# EAGLE board XPL-32 - Copy - Copy (EAGLE 9.6.2)
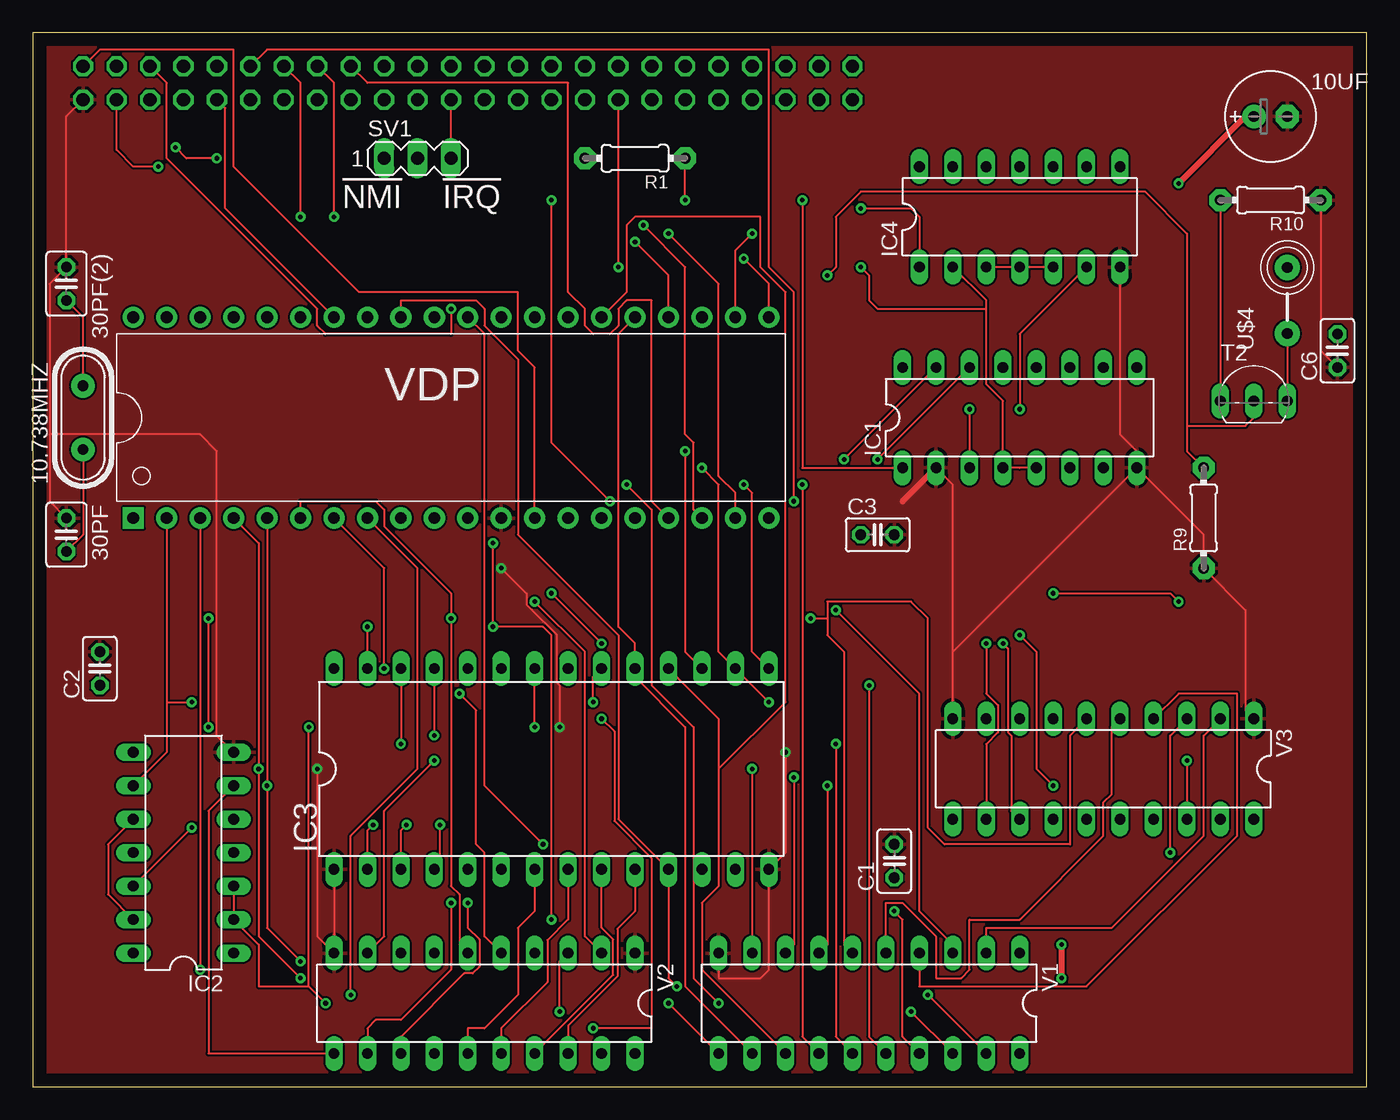
[diagram p0: board, top side]
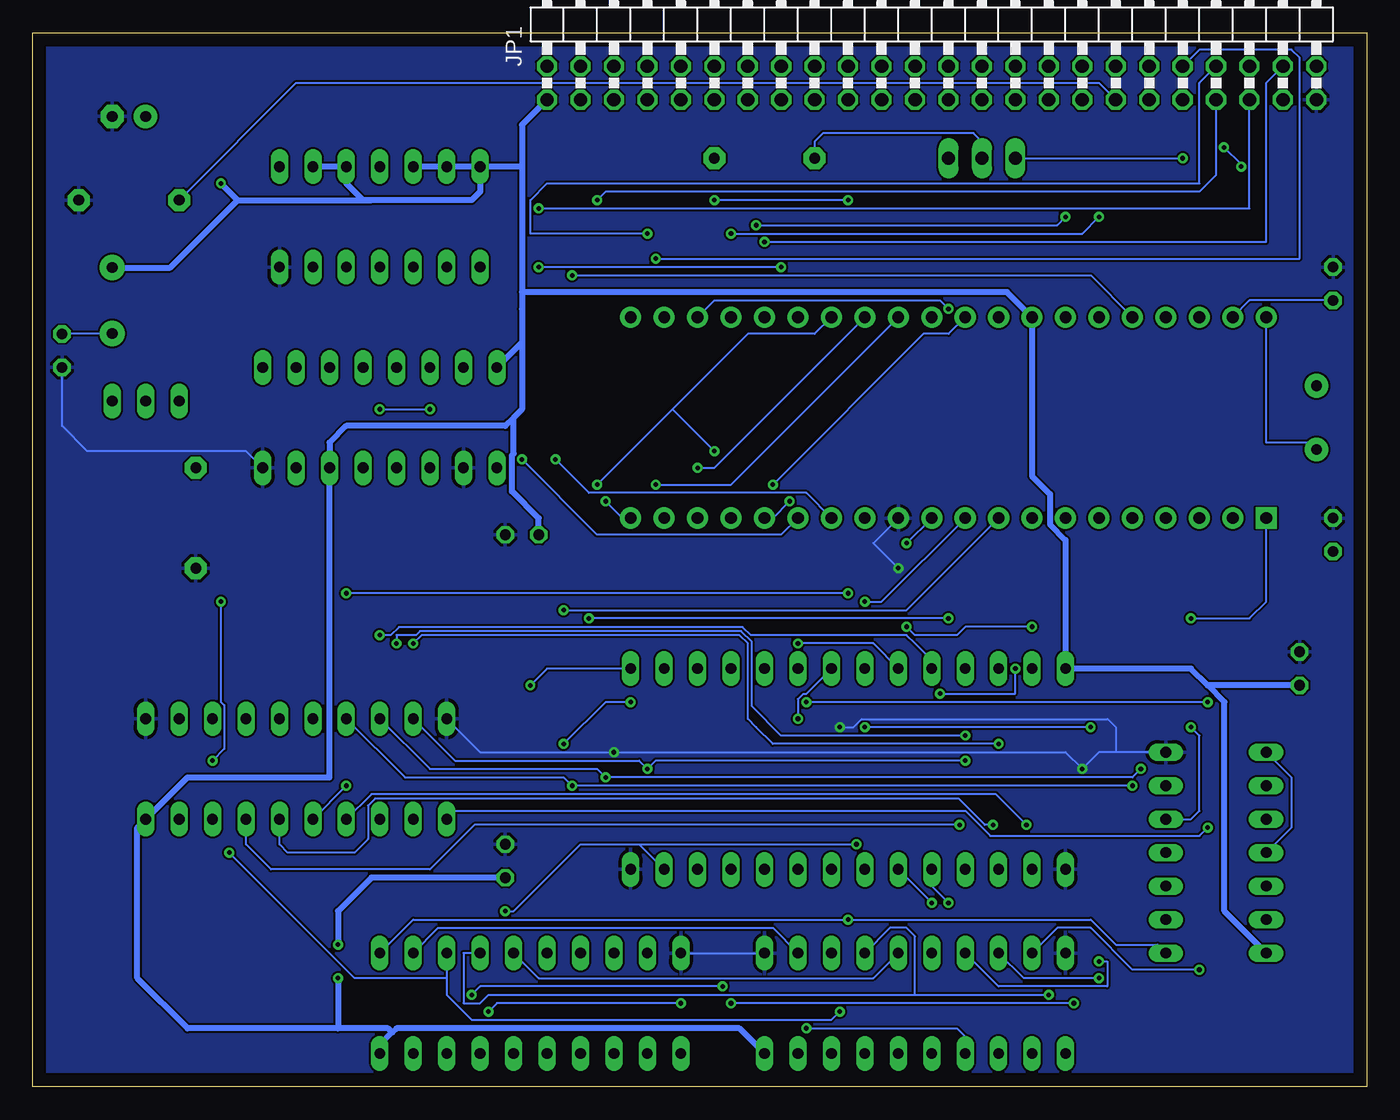
[diagram p1: board, bottom side, seen from below]

Size 101.27 x 80 mm. Coordinates in mm from the lower left corner, seen from the top.
Outline: 0,0 101.27,0 101.27,80 0,80 0,0
Copper layers (1*16): Top 0.035mm / dielectric 1.5mm / Bottom 0.035mm
Design rules "default": minimum track width 6mil, minimum drill 0.35mm, track to track 6mil, track to pad 6mil, pad to pad 6mil, via to via 6mil, smd to smd 6mil, copper to edge 40mil, drill to drill 6mil, minimum pad ring 10mil, minimum via ring 8mil, stop-mask expansion 4mil, vias tented up to drill 0mil, thermal gap 10mil

## Footprints (pad centres in the part's own frame; a part is rotated, then mirrored left to right if it is on the bottom)
HC49 = drill 0.813 pad 1.8: 1 -2.413,0; 2 2.413,0
E2,5-7 = drill 0.813 pad 1.778: + -1.27,0 | drill 0.813 pad 1.778 octagon: - 1.27,0
C025-030X050 = drill 0.813 octagon: 1 -1.27,0; 2 1.27,0
C025-025X050 = drill 0.813 octagon: 1 -1.27,0; 2 1.27,0
DIL16 = drill 0.813 long: 1 -8.89,-3.81; 2 -6.35,-3.81; 3 -3.81,-3.81; 4 -1.27,-3.81; 5 1.27,-3.81; 6 3.81,-3.81; 7 6.35,-3.81; 8 8.89,-3.81; 9 8.89,3.81; 10 6.35,3.81; 11 3.81,3.81; 12 1.27,3.81; 13 -1.27,3.81; 14 -3.81,3.81; 15 -6.35,3.81; 16 -8.89,3.81
DIL14 = drill 0.813 long: 1 -7.62,-3.81; 2 -5.08,-3.81; 3 -2.54,-3.81; 4 0,-3.81; 5 2.54,-3.81; 6 5.08,-3.81; 7 7.62,-3.81; 8 7.62,3.81; 9 5.08,3.81; 10 2.54,3.81; 11 0,3.81; 12 -2.54,3.81; 13 -5.08,3.81; 14 -7.62,3.81
DIL28-6 = drill 0.813 long: 1 -16.51,-7.62; 2 -13.97,-7.62; 3 -11.43,-7.62; 4 -8.89,-7.62; 5 -6.35,-7.62; 6 -3.81,-7.62; 7 -1.27,-7.62; 8 1.27,-7.62; 9 3.81,-7.62; 10 6.35,-7.62; 11 8.89,-7.62; 12 11.43,-7.62; 13 13.97,-7.62; 14 16.51,-7.62; 15 16.51,7.62; 16 13.97,7.62; 17 11.43,7.62; 18 8.89,7.62; 19 6.35,7.62; 20 3.81,7.62; 21 1.27,7.62; 22 -1.27,7.62; 23 -3.81,7.62; 24 -6.35,7.62; 25 -8.89,7.62; 26 -11.43,7.62; 27 -13.97,7.62; 28 -16.51,7.62
2X24/90 = drill 1.016 octagon: 1 -29.21,-6.35; 2 -29.21,-3.81; 3 -26.67,-6.35; 4 -26.67,-3.81; 5 -24.13,-6.35; 6 -24.13,-3.81; 7 -21.59,-6.35; 8 -21.59,-3.81; 9 -19.05,-6.35; 10 -19.05,-3.81; 11 -16.51,-6.35; 12 -16.51,-3.81; 13 -13.97,-6.35; 14 -13.97,-3.81; 15 -11.43,-6.35; 16 -11.43,-3.81; 17 -8.89,-6.35; 18 -8.89,-3.81; 19 -6.35,-6.35; 20 -6.35,-3.81; 21 -3.81,-6.35; 22 -3.81,-3.81; 23 -1.27,-6.35; 24 -1.27,-3.81; 25 1.27,-6.35; 26 1.27,-3.81; 27 3.81,-6.35; 28 3.81,-3.81; 29 6.35,-6.35; 30 6.35,-3.81; 31 8.89,-6.35; 32 8.89,-3.81; 33 11.43,-6.35; 34 11.43,-3.81; 35 13.97,-6.35; 36 13.97,-3.81; 37 16.51,-6.35; 38 16.51,-3.81; 39 19.05,-6.35; 40 19.05,-3.81; 41 21.59,-6.35; 42 21.59,-3.81; 43 24.13,-6.35; 44 24.13,-3.81; 45 26.67,-6.35; 46 26.67,-3.81; 47 29.21,-6.35; 48 29.21,-3.81
0204/7 = drill 0.813 pad 1.676 octagon: 1 -3.81,0; 2 3.81,0
MA03-1 = drill 1.016 long: 1 -2.54,0; 2 0,0; 3 2.54,0
TO92-EBC-OVAL = drill 0.813 long: B 0,-1.27; C 2.54,-1.27; E -2.54,-1.27
FB = drill 0.8 pad 1.93: P$1 -2.5,0; P$2 2.5,0
DIL20 = drill 0.813 long: 1 -11.43,-3.81; 2 -8.89,-3.81; 3 -6.35,-3.81; 4 -3.81,-3.81; 5 -1.27,-3.81; 6 1.27,-3.81; 7 3.81,-3.81; 8 6.35,-3.81; 9 8.89,-3.81; 10 11.43,-3.81; 11 11.43,3.81; 12 8.89,3.81; 13 6.35,3.81; 14 3.81,3.81; 15 1.27,3.81; 16 -1.27,3.81; 17 -3.81,3.81; 18 -6.35,3.81; 19 -8.89,3.81; 20 -11.43,3.81
DIP-40 = drill 0.889 pad 1.6 square: 1 -22.86,-7.62 | drill 0.889 pad 1.6: 2 -20.32,-7.62; 3 -17.78,-7.62; 4 -15.24,-7.62; 5 -12.7,-7.62; 6 -10.16,-7.62; 7 -7.62,-7.62; 8 -5.08,-7.62; 9 -2.54,-7.62; 10 0,-7.62; 11 2.54,-7.62; 12 5.08,-7.62; 13 7.62,-7.62; 14 10.16,-7.62; 15 12.7,-7.62; 16 15.24,-7.62; 17 17.78,-7.62; 18 20.32,-7.62; 19 22.86,-7.62; 20 25.4,-7.62; 21 25.4,7.62; 22 22.86,7.62; 23 20.32,7.62; 24 17.78,7.62; 25 15.24,7.62; 26 12.7,7.62; 27 10.16,7.62; 28 7.62,7.62; 29 5.08,7.62; 30 2.54,7.62; 31 0,7.62; 32 -2.54,7.62; 33 -5.08,7.62; 34 -7.62,7.62; 35 -10.16,7.62; 36 -12.7,7.62; 37 -15.24,7.62; 38 -17.78,7.62; 39 -20.32,7.62; 40 -22.86,7.62

## Placement (x,y rotation side)
10.738MHZ  CRYSTALS-NOGND-HC49  [HC49]  3.81,50.8 90 top
10UF  [E2,5-7]  93.98,73.66 0 top
30PF  [C025-030X050]  2.54,41.91 270 top
30PF(2)  [C025-030X050]  2.54,60.96 270 top
C1  0.1uF  [C025-025X050]  65.41,17.14 90 top
C2  0.1uF  [C025-025X050]  5.08,31.75 90 top
C3  0.1uF  [C025-025X050]  64.14,41.91 0 top
C6  0.1uF  [C025-025X050]  99.06,55.88 90 top
IC1  74HC138N  [DIL16]  74.93,50.8 0 top
IC2  74HCT04N  [DIL14]  11.43,17.78 90 top
IC3  [DIL28-6]  39.37,24.13 0 top
IC4  74LS00N  [DIL14]  74.93,66.04 0 top
JP1  [2X24/90]  33.02,81.28 0 bottom
R1  0  [0204/7]  45.72,70.48 180 top
R9  470  [0204/7]  88.9,43.18 90 top
R10  75  [0204/7]  93.98,67.31 180 top
SV1  [MA03-1]  29.21,70.48 0 top
T2  2N2222  [TO92-EBC-OVAL]  92.71,53.34 0 top
U$4  FB  [FB]  95.25,59.69 90 top
V1  74574N  [DIL20]  63.5,6.35 180 top
V2  74574N  [DIL20]  34.29,6.35 180 top
V3  74574N  [DIL20]  81.28,24.13 180 top
VDP  TMS9918  [DIP-40]  30.48,50.8 0 top

## Library data of the parts
10.738MHZ = IQD-Frequency-Products
10UF R1 R9 R10 T2 U$4 = adafruit
30PF 30PF(2) = cellphone-rcl
C1-C3 C6 = rcl; SPICEPREFIX: C
IC1 IC2 = 74xx-eu
IC3 = memory-hitachi; OC_FARNELL: unknown; OC_NEWARK: unknown
IC4 = 74xx-us
JP1 = pinhead
SV1 = con-lstb; OC_FARNELL: unknown; OC_NEWARK: unknown
V1-V3 = 74ttl-din
VDP = Liam's Inventions

## Nets
!8800-8FFF: IC1.4 IC1.5 IC4.2 JP1.15
!9000-97FF: JP1.17
!9800-9FFF: JP1.19
!A000-A7FF: JP1.21
!A800-AFFF: JP1.23
!CSR: IC1.14 VDP.15
!CSROM: JP1.7
!CSW: IC1.15 VDP.14
!IRQ: R1.1 VDP.16
!OEROM: JP1.5
!READ: JP1.11
!ROM: JP1.9
!RST: JP1.39 VDP.34
!WRITE: JP1.13
A0: JP1.48 VDP.13
A1: JP1.2
A2: JP1.4
A3: JP1.6
A4: JP1.8
A5: JP1.10
A6: JP1.12
A7: JP1.14
A8: JP1.16
A9: JP1.18
A10: JP1.20
A11: JP1.22
A12: JP1.24
A13: JP1.26
A14: JP1.28
A15: JP1.30
AUDIO: JP1.31
AV0: V1.2 V2.2 V3.2 VDP.10
AV1: V1.3 V2.3 V3.3 VDP.9
AV2: V1.4 V2.4 V3.4 VDP.8
AV3: V1.5 V2.5 V3.5 VDP.7
AV4: V1.6 V2.6 V3.6 VDP.6
AV5: V1.7 V2.7 V3.7 VDP.5
AV6: V1.8 V2.8 V3.8 VDP.4
AV7: V1.9 V2.9 V3.9 VDP.3
CAS: IC2.9 IC3.20 VDP.2
CLK: IC4.1 JP1.43
COL: IC2.12 V3.11
D0: JP1.32 VDP.17
D1: JP1.34 VDP.18
D2: JP1.36 VDP.19
D3: JP1.38 VDP.20
D4: JP1.40 VDP.21
D5: JP1.42 VDP.22
D6: JP1.44 VDP.23
D7: JP1.46 VDP.24
EXTSND: JP1.33
EXTVID: JP1.35 R10.2 T2.E
GND: 10UF.- 30PF(2).1 30PF.1 C1.2 C2.2 C3.2 C6.1 IC1.2 IC1.8 IC2.7 IC3.1 IC3.14 IC4.7 JP1.47 R9.1 R10.1 V1.10 V2.1 V2.10 V3.1 V3.10 VDP.12
N$1: IC1.3 IC4.6
N$2: JP1.45 SV1.1
N$3: IC2.8 IC2.11
N$4: IC2.10 IC2.13
N$5: JP1.25 SV1.3
N$6: R1.2 SV1.2
N$19: IC4.3 IC4.4 IC4.5
N$63: C6.2 T2.C U$4.P$1
N$64: R9.2 T2.B VDP.36
N$93: 10.738MHZ.1 30PF.2 VDP.40
N$94: 10.738MHZ.2 30PF(2).2 VDP.39
POTX: JP1.29
POTY: JP1.27
R/!W: IC1.1 JP1.41
RAS: IC2.5 VDP.1
RD: IC2.4
ROW: IC2.6 V2.11
SCLK: JP1.37
VA0: IC3.10 V2.18
VA1: IC3.9 V2.17
VA2: IC3.8 V2.16
VA3: IC3.7 V2.15
VA4: IC3.21 V2.14
VA5: IC3.6 V2.13
VA6: IC3.5 V2.12
VA7: IC3.23 V3.18
VA8: IC3.4 V3.17
VA9: IC3.3 V3.16
VA10: IC3.24 V3.15
VA11: IC3.2 V3.14
VA12: IC3.25 V3.13
VA13: IC3.26 V3.12
VCC: 10UF.+ C1.1 C2.1 C3.1 IC1.6 IC1.16 IC2.14 IC3.28 IC4.9 IC4.10 IC4.12 IC4.13 IC4.14 JP1.1 U$4.P$2 V1.20 V2.20 V3.20 VDP.33
VCC_2: JP1.3
VR0: IC3.11 V1.19 VDP.32
VR1: IC3.12 V1.18 VDP.31
VR2: IC3.13 V1.17 VDP.30
VR3: IC3.15 V1.16 VDP.29
VR4: IC3.16 V1.15 VDP.28
VR5: IC3.17 V1.14 VDP.27
VR6: IC3.18 V1.13 VDP.26
VR7: IC3.19 V1.12 VDP.25
WE: IC2.1 IC3.27 V1.1 VDP.11
WR: IC2.2 IC2.3 IC3.22 V1.11

## Tracks (layer width: path | path; a pad name or v marks a point on that pad's centre or on a via)
!8800-8FFF  (via drill 0.35)
  Top 0.152: IC1.5 74.93,46.99 IC1.4 73.66,52.07 72.39,53.34 72.39,59.05 | v44.45,62.23 JP1.15 | IC4.2 72.39,59.69 72.39,59.05 | v62.87,62.23 63.5,61.59 63.5,59.69 64.14,59.05 72.39,59.05
  Bottom 0.152: v44.45,62.23 v62.87,62.23
!CSR  (via drill 0.35)
  Top 0.152: v64.14,47.62 IC1.14
  Bottom 0.152: v64.14,47.62 58.42,41.91 44.45,41.91 VDP.15
!CSW  (via drill 0.35)
  Top 0.152: v61.6,47.62 IC1.15
  Bottom 0.152: v61.6,47.62 59.05,45.09 42.55,45.09 VDP.14
!IRQ  (via drill 0.35)
  Top 0.152: v39.37,67.31 39.37,48.9 v43.82,44.45 | v49.53,67.31 R1.1
  Bottom 0.152: v43.82,44.45 45.09,43.18 VDP.16 | v39.37,67.31 v49.53,67.31
!RST
  Top 0.152: JP1.39 14.61,74.3 14.61,66.67 VDP.34
A0
  Top 0.152: JP1.48 5.08,78.74 15.24,78.74 15.24,69.85 24.77,60.33 36.83,60.33 36.83,55.88 38.1,54.61 VDP.13
AV0  (via drill 0.35)
  Top 0.152: V3.2 88.9,26.67 88.9,19.05 81.91,12.06 72.39,12.06 V1.2 | v38.1,36.83 41.91,33.02 41.91,11.43 V2.2
  Bottom 0.152: V2.2 45.09,12.06 70.48,12.06 V1.2 | VDP.10 36.83,36.83 v38.1,36.83
AV1  (via drill 0.35)
  Top 0.152: V2.3 40.01,9.53 v40.01,5.71 | V3.3 86.36,26.67 v86.36,17.78 | v60.96,36.2 67.31,29.84 67.31,13.34 69.85,10.79 V1.3
  Bottom 0.152: v40.01,5.71 40.64,5.08 67.94,5.08 69.85,6.99 69.85,8.26 | V1.3 69.85,8.26 | v86.36,17.78 76.83,8.26 69.85,8.26 | VDP.9 34.93,36.2 v60.96,36.2
AV2  (via drill 0.35)
  Top 0.152: V3.4 86.99,29.84 91.44,29.84 91.44,19.05 80.01,7.62 67.31,7.62 V1.4 | VDP.8 29.21,39.37 29.21,24.13 24.13,19.05 v24.13,6.99
  Bottom 0.152: V2.4 36.2,12.06 34.93,12.06 34.29,11.43 34.29,6.99 | 34.29,6.99 66.67,6.99 67.31,6.35 68.58,6.35 68.58,10.16 V1.4 | 34.29,6.99 v24.13,6.99
AV3  (via drill 0.35)
  Top 0.152: V3.5 81.91,27.3 81.91,22.23 81.28,21.59 81.28,19.05 74.93,12.7 71.12,12.7 71.12,8.89 70.48,8.26 68.58,8.26 68.58,11.43 66.04,13.97 64.77,13.97 V1.5 | VDP.7 26.67,39.37 v26.67,31.75 | v32.38,29.84 33.66,28.57 33.66,18.41 34.29,17.78 34.29,11.43 V2.5
  Bottom 0.152: V2.5 37.47,8.26 62.87,8.26 V1.5 | v26.67,31.75 26.67,29.84 v32.38,29.84
AV4  (via drill 0.35)
  Top 0.152: V1.6 61.6,10.79 61.6,33.02 60.33,34.29 60.33,35.56 | 60.33,35.56 60.33,36.83 66.67,36.83 67.94,35.56 67.94,19.68 69.21,18.41 78.74,18.41 78.74,26.67 V3.6 | V2.6 32.38,10.79 32.38,14.61 31.75,15.24 v31.75,35.56 31.75,37.47 26.67,42.55 26.67,43.81 26.04,44.45 20.32,44.45 VDP.6 | v59.05,35.56 60.33,35.56
  Bottom 0.152: v31.75,35.56 v59.05,35.56
AV5  (via drill 0.35)
  Top 0.152: V1.7 60.33,10.79 v60.33,22.86 | v20.32,9.53 17.78,12.06 v17.78,22.86 VDP.5
  Bottom 0.152: V3.7 73.02,23.5 60.96,23.5 v60.33,22.86 v17.78,22.86 | V2.7 27.94,7.62 19.68,7.62 19.68,9.53 v20.32,9.53
AV6  (via drill 0.35)
  Top 0.152: V1.8 57.79,10.79 v57.79,23.5 | v20.32,8.26 17.14,11.43 v17.14,24.13 17.14,41.27 VDP.4
  Bottom 0.152: V3.8 71.12,24.13 58.42,24.13 v57.79,23.5 17.78,23.5 v17.14,24.13 | V2.8 26.04,8.26 v20.32,8.26
AV7  (via drill 0.35)
  Top 0.152: v54.61,24.13 V1.9 | VDP.3 v12.7,8.89 | v30.48,24.77 26.67,20.95 26.67,11.43 V2.9
  Bottom 0.152: V3.9 69.21,24.77 55.25,24.77 v54.61,24.13 53.98,24.77 v30.48,24.77 | V2.9 23.5,12.06 20.95,12.06 17.78,8.89 v12.7,8.89
CAS  (via drill 0.35)
  Top 0.152: IC2.9 10.16,25.4 10.16,29.21 | VDP.2 10.16,29.21 | IC3.20 42.55,31.11 v42.55,29.21 | 10.16,29.21 v12.06,29.21
  Bottom 0.152: v12.06,29.21 v42.55,29.21
CLK  (via drill 0.35)
  Top 0.152: IC4.1 67.31,66.04 66.67,66.67 v62.87,66.67
  Bottom 0.152: JP1.43 8.89,66.67 v62.87,66.67
COL  (via drill 0.35)
  Top 0.152: v12.06,19.68 IC2.12
  Bottom 0.152: v12.06,19.68 12.7,19.05 28.57,19.05 30.48,20.95 69.21,20.95 V3.11
D0
  Top 0.152: JP1.32 25.4,76.2 40.64,76.2 40.64,60.33 41.91,59.05 41.91,57.78 42.55,57.15 43.82,57.15 44.45,57.78 44.45,59.05 45.09,59.69 46.99,59.69 46.99,44.45 VDP.17
D1  (via drill 0.35)
  Top 0.152: JP1.34 22.86,76.2 v22.86,66.04 | v46.36,65.41 49.53,62.23 49.53,49.53 50.17,48.9 50.17,43.81 VDP.18
  Bottom 0.152: v22.86,66.04 23.5,65.41 v46.36,65.41
D2  (via drill 0.35)
  Top 0.152: JP1.36 20.32,76.2 v20.32,66.04 | v48.26,64.77 52.07,60.96 52.07,46.35 53.34,45.09 VDP.19
  Bottom 0.152: v20.32,66.04 21.59,64.77 v48.26,64.77
D3  (via drill 0.35)
  Top 0.152: JP1.38 17.78,78.74 55.88,78.74 55.88,62.23 57.79,60.33 v57.79,44.45
  Bottom 0.152: v57.79,44.45 56.52,43.18 VDP.20
D4  (via drill 0.35)
  Top 0.152: v53.98,62.87 55.88,60.96 VDP.21
  Bottom 0.152: JP1.40 12.7,78.74 5.71,78.74 5.08,78.11 5.08,62.87 v53.98,62.87
D5  (via drill 0.35)
  Top 0.152: v54.61,64.77 53.34,63.5 VDP.22
  Bottom 0.152: JP1.42 12.7,76.2 12.7,68.58 62.23,68.58 63.5,67.31 63.5,64.77 v54.61,64.77
D6  (via drill 0.35)
  Top 0.152: JP1.44 10.16,76.2 10.16,70.48 21.59,59.05 21.59,57.78 22.22,57.15 31.75,57.15 v31.75,59.05
  Bottom 0.152: v31.75,59.05 32.38,59.69 49.53,59.69 VDP.23
D7  (via drill 0.35)
  Top 0.152: v45.72,64.14 48.26,61.59 VDP.24
  Bottom 0.152: JP1.46 7.62,76.2 7.62,64.14 v45.72,64.14
EXTVID
  Top 0.152: R10.2 T2.E
  Bottom 0.152: JP1.35 20.32,76.2 81.28,76.2 R10.2
GND  (via drill 0.35)
  Top 0.152: C6.1 97.79,55.88 R10.1 | V3.1 92.08,28.57 92.08,36.2 R9.1 88.9,41.91 IC1.8 | 30PF.1 1.27,44.45 1.27,49.53 | 1.27,49.53 1.27,60.96 30PF(2).1 2.54,73.66 JP1.47 | v21.59,24.13 21.59,11.43 V2.10 IC3.1 | V1.10 52.07,8.26 55.25,8.26 55.88,8.89 IC3.14 57.15,17.78 v57.15,25.4 | IC1.2 69.85,45.72 69.85,33.02 | V3.10 69.85,33.02 | 1.27,49.53 12.7,49.53 13.97,48.26 13.97,26.67 IC2.7 | 69.85,33.02 IC1.8 | IC4.7 82.55,49.53 83.82,48.26 IC1.8 | v40.01,27.3 40.01,30.47 39.75,30.72 39.75,34.34 37.87,36.22 37.85,36.22 37.49,36.58 37.49,37.44 v35.56,39.37
  Top 0.457: IC1.2 66.04,44.45
  Bottom 0.152: C6.1 99.06,50.16 97.16,48.26 85.09,48.26 IC1.8 | IC2.7 19.05,25.4 | 19.05,25.4 20.32,25.4 v21.59,24.13 22.86,25.4 v57.15,25.4 67.31,25.4 V3.10 | V1.10 V2.1 | VDP.12 37.47,41.27 v35.56,39.37 | v40.01,27.3 38.96,27.3 38.35,27.91 19.71,27.91 19.68,27.94 19.05,27.3 19.05,25.4
  pour Top: 0,80.01 0,0 101.6,0 101.6,80.01
  pour Bottom: 0,80.01 0,0 101.6,0 101.6,80.01
N$1  (via drill 0.35)
  Top 0.152: IC4.6 74.93,57.15 v74.93,51.44 | v71.12,51.44 IC1.3
  Bottom 0.152: v74.93,51.44 v71.12,51.44
N$2  (via drill 0.35)
  Top 0.152: v13.97,70.48 11.65,70.48 v10.82,71.31 | v9.53,69.85 7.62,69.85 6.35,71.12 JP1.45
  Bottom 0.152: SV1.1 v13.97,70.48 | v10.82,71.31 9.53,70.02 v9.53,69.85
N$3
  Bottom 0.152: IC2.11 5.71,19.68 5.71,23.5 IC2.8
N$4
  Top 0.152: IC2.13 5.71,14.61 5.71,18.41 IC2.10
N$5
  Top 0.152: SV1.3 JP1.25
N$6
  Bottom 0.152: SV1.2 29.21,71.75 29.84,72.39 41.28,72.39 41.91,71.75 R1.2
N$19
  Top 0.152: IC4.3 IC4.4 IC4.5
N$63
  Top 0.152: T2.C 95.25,57.15 U$4.P$1
  Bottom 0.152: C6.2 95.25,57.15 U$4.P$1
N$64  (via drill 0.35)
  Top 0.152: v60.33,61.59 60.96,62.23 60.96,66.04 62.87,67.94 84.45,67.94 87.63,64.77 87.63,50.16 | R9.2 87.63,48.26 87.63,50.16 | 87.63,50.16 92.08,50.16 92.71,50.8 T2.B
  Bottom 0.152: VDP.36 20.95,61.59 v60.33,61.59
N$93
  Top 0.152: 30PF.2 3.81,41.91 3.81,48.26 10.738MHZ.1
  Bottom 0.152: VDP.40 7.62,48.9 3.81,48.9 10.738MHZ.1
N$94
  Top 0.152: 30PF(2).2 3.81,58.42 3.81,53.34 10.738MHZ.2
  Bottom 0.152: VDP.39 8.89,59.69 30PF(2).2
R/!W  (via drill 0.35)
  Top 0.152: IC1.1 58.42,46.99 v58.42,67.31
  Bottom 0.152: v58.42,67.31 57.79,67.94 12.7,67.94 11.43,69.22 JP1.41
RAS  (via drill 0.35)
  Top 0.152: v13.33,27.3 v13.33,35.56
  Bottom 0.152: IC2.5 13.33,20.32 12.7,20.95 12.7,26.67 v13.33,27.3 | v13.33,35.56 8.89,35.56 7.62,36.83 VDP.1
ROW
  Top 0.152: V2.11 13.33,2.54 13.33,20.95 IC2.6
VA0
  Top 0.152: IC3.10 45.72,13.34 44.37,11.99 44.37,8.38 40.64,4.65 V2.18
VA1
  Top 0.152: IC3.9 43.18,12.08 44.07,11.19 44.07,8.51 V2.17
VA2
  Top 0.152: IC3.8 40.64,12.71 39.07,11.14 39.07,7.95 35.56,4.45 V2.16
VA3
  Top 0.152: IC3.7 38.1,13.34 36.83,12.06 36.83,6.99 34.29,4.45 33.02,4.45 V2.15
VA4  (via drill 0.35)
  Top 0.152: v43.18,27.94 44.15,26.98 44.15,20.19 46.99,17.35 46.99,4.45 v42.55,4.45
  Bottom 0.152: IC3.21 42.57,29.82 42.8,29.82 43.18,29.43 v43.18,27.94 | v42.55,4.45 31.11,4.45 30.48,3.81 V2.14
VA5  (via drill 0.35)
  Top 0.152: v33.02,13.97 33.02,12.08 33.91,11.19 33.91,9.13 33.39,8.61 32.74,8.61 27.94,3.81 V2.13
  Bottom 0.152: IC3.6 v33.02,13.97
VA6  (via drill 0.35)
  Top 0.152: v31.75,13.97 31.75,8.89 27.94,5.08 26.04,5.08 25.4,4.45 V2.12
  Bottom 0.152: IC3.5 33.02,15.24 v31.75,13.97
VA7  (via drill 0.35)
  Top 0.152: v43.18,33.66 v39.37,37.47 | v77.47,37.47 86.36,37.47 v86.99,36.83 | v87.63,24.77 V3.18
  Bottom 0.152: IC3.23 37.47,33.66 v43.18,33.66 | v39.37,37.47 v77.47,37.47 | v86.99,36.83 86.99,29.22 86.74,28.97 86.74,25.65 v87.63,24.77
VA8  (via drill 0.35)
  Top 0.152: IC3.4 30.91,16.94 v30.91,19.89
  Bottom 0.152: v30.91,19.89 67.74,19.89 71.12,16.51 83.19,16.51 85.09,18.41 V3.17
VA9  (via drill 0.35)
  Top 0.152: IC3.3 27.94,19.46 v28.37,19.89
  Bottom 0.152: v28.37,19.89 28.98,19.89 30.96,21.87 75.3,21.87 75.82,21.35 75.82,18.8 76.83,17.78 81.91,17.78 82.55,18.41 V3.16
VA10  (via drill 0.35)
  Top 0.152: v74.93,34.29 76.2,33.02 76.2,24.13 v77.47,22.86
  Bottom 0.152: IC3.24 33.02,32.38 34.29,33.66 34.93,34.29 46.76,34.29 47.37,34.9 73.48,34.9 74.09,34.29 v74.93,34.29 | v77.47,22.86 V3.15
VA11  (via drill 0.35)
  Top 0.152: IC3.2 25.4,19.46 v25.83,19.89
  Bottom 0.152: v25.83,19.89 28.16,22.23 75.56,22.23 V3.14
VA12  (via drill 0.35)
  Top 0.152: IC3.25 v30.48,26.67 | v73.66,33.66 74.04,33.27 74.04,26.91 74.3,26.66 74.3,20.95 V3.13
  Bottom 0.152: v30.48,26.67 44.45,26.67 46.69,28.91 46.69,33.78 47.5,34.59 71.88,34.59 72.19,34.29 73.66,34.29 v73.66,33.66
VA13  (via drill 0.35)
  Top 0.152: IC3.26 v27.94,26.04 | v72.39,33.66 72.39,29.86 73.28,28.97 73.28,26.91 72.39,26.02 V3.12
  Bottom 0.152: v27.94,26.04 45.09,26.04 46.36,27.3 46.99,27.94 46.99,33.66 47.62,34.29 71.75,34.29 v72.39,33.66
VCC  (via drill 0.35)
  Top 0.457: v78.1,10.79 v78.1,8.26 | v86.99,68.58 92.08,73.66 10UF.+
  Bottom 0.152: 78.74,47.62 IC1.6
  Bottom 0.457: JP1.1 64.14,73.03 64.14,69.85 | IC1.16 64.14,56.52 | 64.14,69.85 64.14,60.33 | 64.14,60.33 64.14,59.05 64.14,56.52 | 64.14,56.52 64.14,51.44 64.77,50.8 | 64.77,50.8 65.41,50.16 77.47,50.16 78.74,48.9 78.74,47.62 | IC2.14 10.79,13.34 10.79,29.21 12.06,30.48 | 12.06,30.48 13.33,31.75 IC3.28 22.86,41.51 24.04,42.69 24.04,45 25.4,46.35 VDP.33 27.3,60.33 64.14,60.33 | V2.20 47.62,4.45 73.66,4.45 73.98,4.13 | 73.98,4.13 74.93,3.17 V1.20 | 73.98,4.13 74.3,4.45 78.1,4.45 | 78.1,4.45 89.53,4.45 93.34,8.26 93.34,19.68 V3.20 89.53,23.5 78.74,23.5 IC1.6 | 64.14,69.85 IC4.14 | IC4.14 67.31,67.94 67.94,67.31 75.56,67.31 | 75.56,67.31 76.2,67.31 77.47,68.58 IC4.10 IC4.9 | U$4.P$2 90.84,62.19 85.72,67.31 | 85.72,67.31 75.56,67.31 | IC4.14 IC4.13 IC4.12 | C1.1 75.56,15.88 78.1,13.34 v78.1,10.79 | v78.1,8.26 78.1,4.45 | C2.1 12.06,30.48 | C3.1 62.87,43.18 64.89,45.21 64.89,47.94 64.77,48.06 64.77,50.8 | 85.72,67.31 v86.99,68.58
VR0  (via drill 0.35)
  Top 0.152: VDP.32 27.94,59.69 33.66,59.69 34.29,59.05 34.29,57.78 36.83,55.24 36.83,41.91 44.45,34.29 44.45,20.32 IC3.11 48.26,8.26 v48.9,7.62 | v67.94,6.99 V1.19
  Bottom 0.152: v67.94,6.99 67.31,7.62 v48.9,7.62
VR1  (via drill 0.35)
  Top 0.152: 50.17,17.14 IC3.12 50.17,17.14 | 50.17,17.14 50.17,27.3 46.99,30.48 46.99,43.81 v45.09,45.72 | v66.67,5.71 V1.18 | v52.07,6.35 50.17,8.26 50.17,17.14
  Bottom 0.152: v45.09,45.72 33.66,57.15 31.75,57.15 VDP.31 | v66.67,5.71 66.04,6.35 v52.07,6.35
VR2  (via drill 0.35)
  Top 0.152: v65.41,13.34 66.04,12.7 66.04,3.81 V1.17 | VDP.30 34.29,57.15 34.29,22.86 v38.74,18.41
  Bottom 0.152: 55.25,18.41 IC3.13 | 55.25,18.41 59.69,18.41 64.77,13.34 v65.41,13.34 | 55.25,18.41 v38.74,18.41
VR3  (via drill 0.35)
  Top 0.152: V1.16 63.5,3.81 v63.5,30.48 | v53.98,45.72 54.61,45.09 54.61,33.02 IC3.15
  Bottom 0.152: v63.5,30.48 62.23,31.75 IC3.15 | VDP.29 48.26,45.72 v53.98,45.72
VR4  (via drill 0.35)
  Top 0.152: V1.15 60.96,3.81 v60.96,26.04 | v55.88,29.21 IC3.16 52.07,33.02 52.07,45.72 v50.8,46.99
  Bottom 0.152: v60.96,26.04 57.79,29.21 v55.88,29.21 | VDP.28 49.53,46.99 v50.8,46.99
VR5  (via drill 0.35)
  Top 0.152: V1.14 58.42,3.81 v58.42,45.72 | IC3.17 49.53,33.02 v49.53,48.26
  Bottom 0.152: 52.71,51.44 46.99,57.15 41.91,57.15 VDP.27 | 52.71,51.44 v58.42,45.72 | 52.71,51.44 v49.53,48.26
VR6
  Top 0.152: V1.13 50.8,8.89 50.8,13.97 52.07,15.24 52.07,24.13 | 52.07,24.13 52.07,27.94 IC3.18 | VDP.26 45.09,60.33 45.09,65.41 45.72,66.04 55.25,66.04 55.25,62.23 57.15,60.33 57.15,29.21 52.07,24.13
VR7
  Top 0.152: V1.12 49.53,7.62 49.53,27.3 45.72,31.11 IC3.19 45.72,33.66 44.45,34.92 44.45,57.15 VDP.25
WE  (via drill 0.35)
  Top 0.152: v34.93,41.27 v34.93,34.92 38.74,34.92 39.37,34.29 v39.37,12.7 | IC3.27 v25.4,34.92
  Bottom 0.152: VDP.11 v34.93,41.27 | IC2.1 15.88,10.79 19.05,10.79 20.95,12.7 v39.37,12.7 72.39,12.7 V1.1 | v25.4,34.92 30.48,34.92 31.11,34.29 34.29,34.29 v34.93,34.92
WR  (via drill 0.35)
  Top 0.152: IC2.3 IC2.2 17.14,10.79 17.14,7.62 20.95,7.62 | 20.95,7.62 v20.95,27.3 | v48.26,6.35 V1.11 | 20.95,7.62 v22.22,6.35 | v38.1,27.3 IC3.22
  Bottom 0.152: v22.22,6.35 v48.26,6.35 | v20.95,27.3 v38.1,27.3

## Text on the board
tNames: !NMI | !IRQ